# Altium PCB vi.pcbdoc
Units mil, origin at the board's own origin, x right, y up, seen from the top; angles counter-clockwise.
Board outline 5250 x 4200 mil, 2 copper layers (Top Layer, Bottom Layer); 10 components, 4 nets, 6 pads, 0 vias.
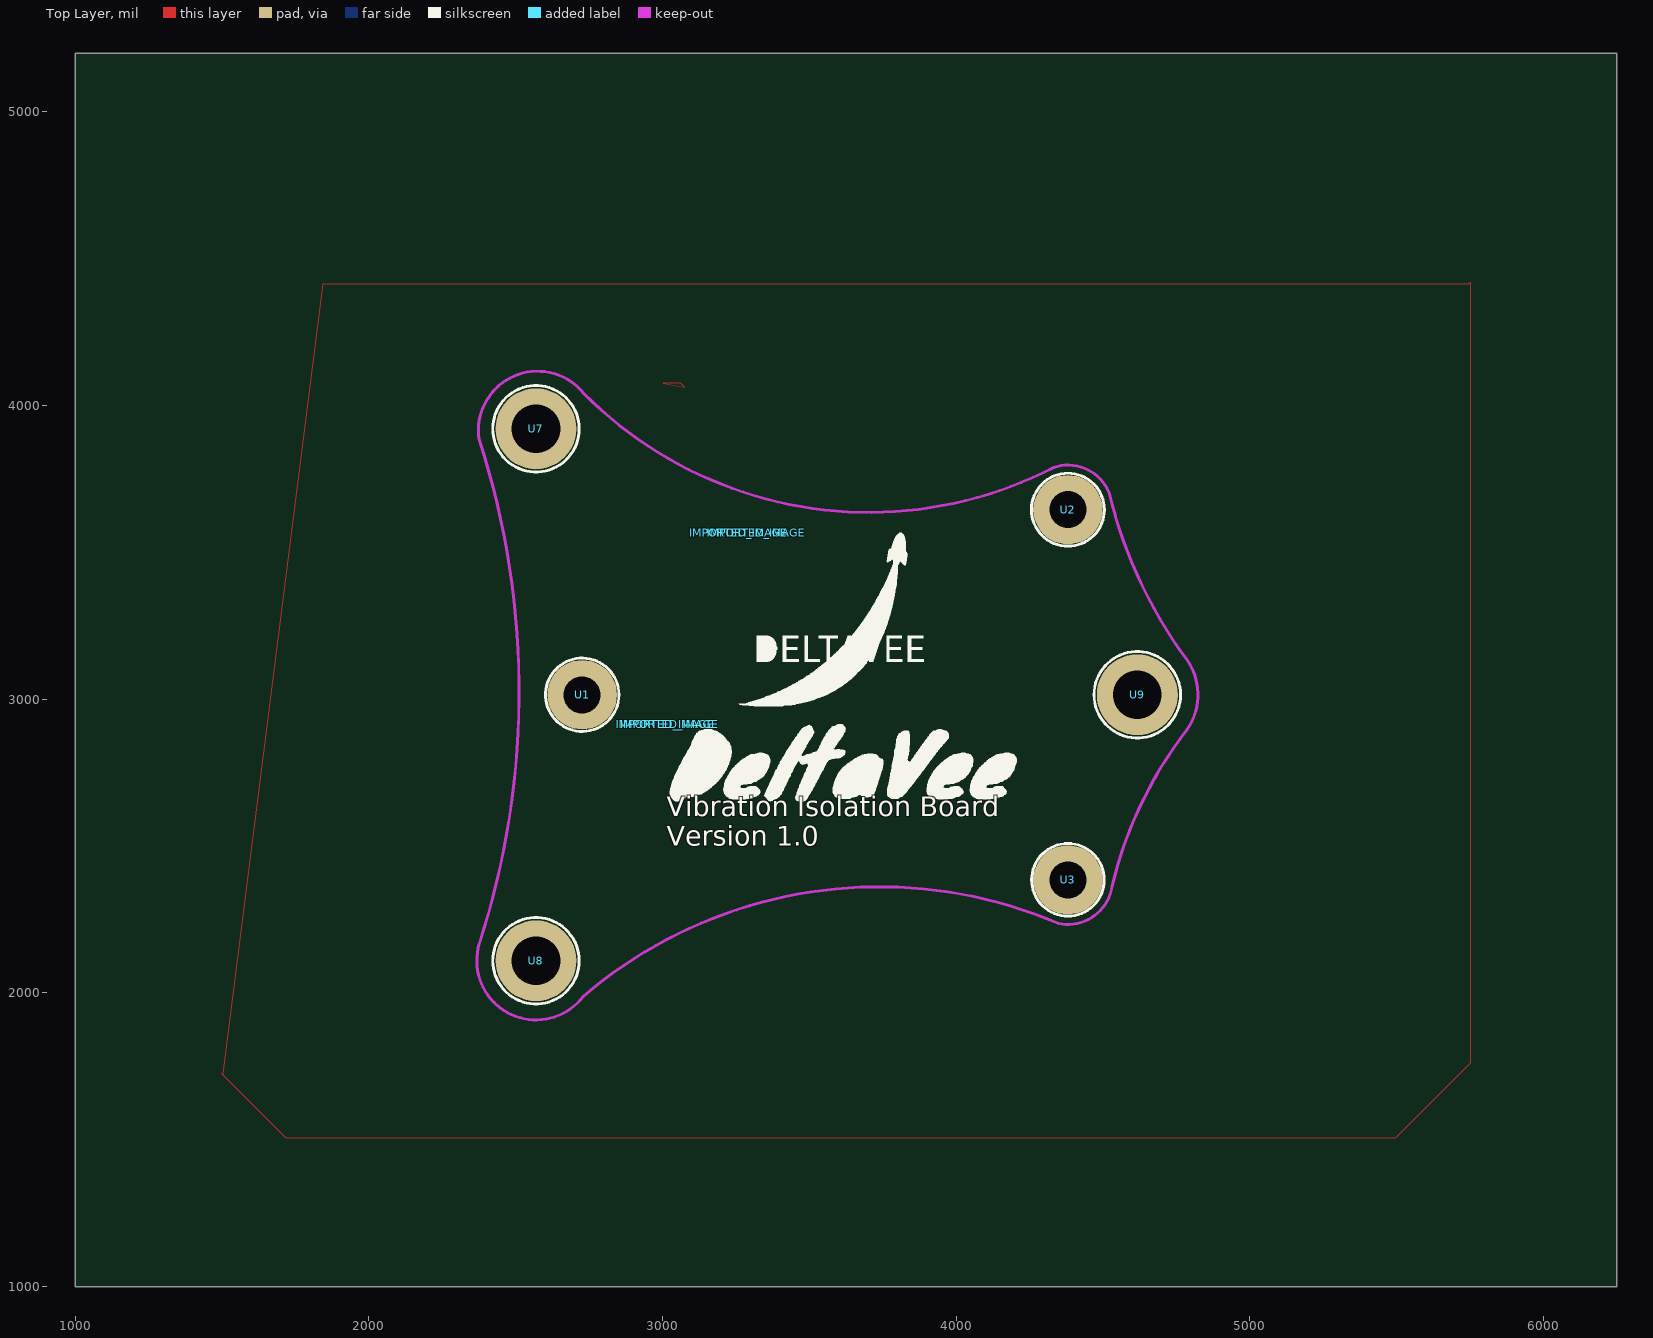
[diagram p0: Top Layer view]
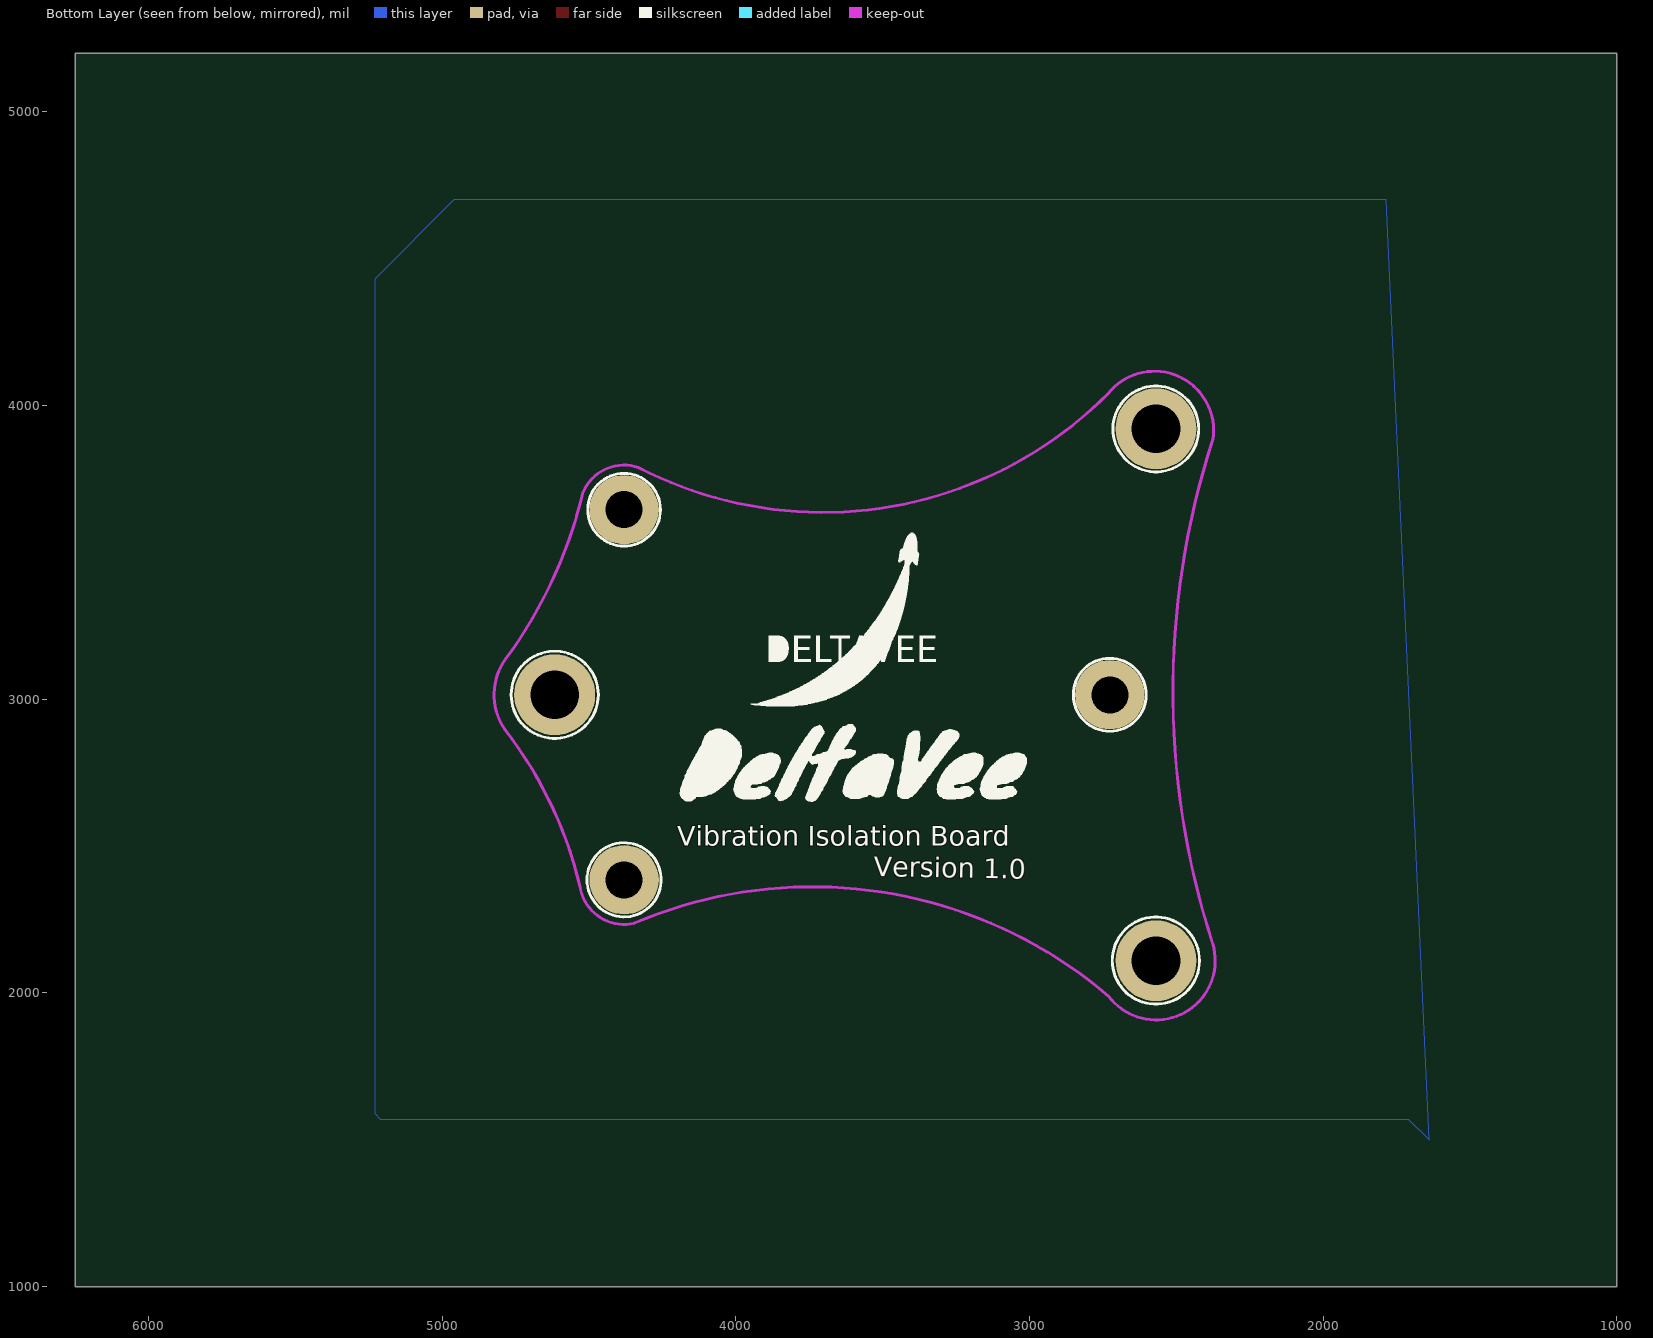
[diagram p1: Bottom Layer view, seen from below]

## Layer stack, top to bottom
Top Layer: signal copper (thickness not stored)
Dielectric: dielectric 12.6, FR-4, Dk 4.8
Bottom Layer: signal copper (thickness not stored)

## Board outline
6250,1000 1000,1000 1000,5200 6250,5200

## Components (designator, comment, footprint, x,y, rotation, side; value= is the part's Value field where it differs from the comment)
IMPORTED_IMAGE "IMPORTED_IMAGE" IMPORTED_IMAGE 3319.95,3565.94 r0 top
IMPORTED_IMAGE "IMPORTED_IMAGE" IMPORTED_IMAGE 3009.35,2915.35 r0 top
IMPORTED_IMAGE "IMPORTED_IMAGE" IMPORTED_IMAGE 3024.55,2915.35 r0 top
IMPORTED_IMAGE "IMPORTED_IMAGE" IMPORTED_IMAGE 3260.13,3565.94 r0 top
U1 "MH_M3" MH_M3_PCB 2726.97,3015 r0 top
U2 "MH_M3" MH_M3_PCB 4380.51,3645 r0 top
U3 "MH_M3" MH_M3_PCB 4380.51,2385.08 r0 top
U7 "MH_M4_S" MH_M4_PCB 2569.49,3920.51 r0 top
U8 "MH_M4_S" MH_M4_PCB 2569.49,2109.49 r0 top
U9 "MH_M4_S" MH_M4_PCB 4616.73,3015 r0 top

## Footprints (in the part's own frame and the unit in brackets; to place one, negate y for a bottom-side part, rotate by r counter-clockwise, add the part's x,y. Pads: shape width x height; smd on the part's side, far side on the other; paste and mask are expansions set on the pad)
IMPORTED_IMAGE [mil]
MH_M3_PCB [mm]
  round 6 hole 3.2 paste+0 mask+0.051: 1(0,0)
MH_M4_PCB [mm]
  round 7 hole 4.2 paste+0 mask+0.051: 1(0,0)
  silkscreen extent -3.74,-3.73 3.74,3.73

## Nets (pads, with @x,y where several pads share a name; then routed paths per layer and width w, separated by ;. In a path a pad name is that pad's centre, name@x,y a point inside that pad or via, vN(x,y) a via of type N, cw(c..) or ccw(c..) an arc to the next point about the centre after c; other vN are vias at no path point)
GND: U1.1 U2.1 U3.1 U7.1 U8.1 U9.1
S$284: 
S$932: 
S$948: 

## Polygon pours and split planes (outlines as drawn)
GND on Bottom Layer (solid): 1785,4700 4960,4700 5230,4430 5230,1590 5210,1570 1710,1570 1640,1500
GND on Top Layer (solid): 3075.46,4062.04 3062.5,4075 3003.31,4075 3075.46,4062.04
GND on Top Layer (solid): 1845,4415 5745,4415 5750,4420 5750,1760 5495,1505 1720,1505 1500,1725 1505,1725

## Keep-outs
Keep-Out Layer:
  lines w10 net S$284: 2376.06,2166.15 ccw(c2569.49,2109.49) 2730.59,1988.36 cw(c3739.11,810.68) 4347.1,2237 ; 2376.1,2166.2 ccw(c-269.29,3025.19) 2375.57,3885.82 cw(c2575,3915) 2732.39,4040.91 ccw(c3703.74,5003.51) 4332.1,3788.9
  lines w10 net S$932: 4332.05,3788.91 cw(c4380.51,3645) 4520,3705 ccw(c6065.66,4076.78) 4786.6,3132.7 ; 4347.06,2236.96 ccw(c4380.51,2385.08) 4530.62,2362.19
  lines w10 net S$948: 4530.6,2362.2 cw(c5898.93,2036.03) 4785.24,2895.34 ccw(c4616.73,3015) 4786.64,3132.67

## Silkscreen, mask and mechanical layers (free items; w line width, h text height)
Top Overlay:
  circle w10: c4380.51,3645 r124.2
  circle w10: c2726.97,3015 r125
  circle w10: c4380.51,2385 r123.49
  text "Vibration Isolation Board / Version 1.0" at 3015,2501.54 h66.93
Bottom Overlay:
  circle w10: c2726.97,3015 r124.2
  circle w10: c4616.73,3015 r148.41
  circle w10: c4380.51,3645 r123.79
  circle w10: c4380.51,2385.08 r126.19
  circle w10: c2570,3920 r146.03
  circle w10: c2570,2110 r148.41
  text "Vibration Isolation Board" at 4200,2501.54 h66.93
  text "Version 1.0" at 3530.58,2396.54 h66.93 r1
Document:
  lines w0.1: 3624.99,3099.99 3625.01,3100.01